# Altium PCB CW308T_EFR32MG21.PcbDoc
Units mil, origin at the board's own origin, x right, y up, seen from the top; angles counter-clockwise.
Board outline 2055 x 2540 mil, 2 copper layers (Top Layer, Bottom Layer); 18 components, 26 nets, 131 pads, 91 vias.
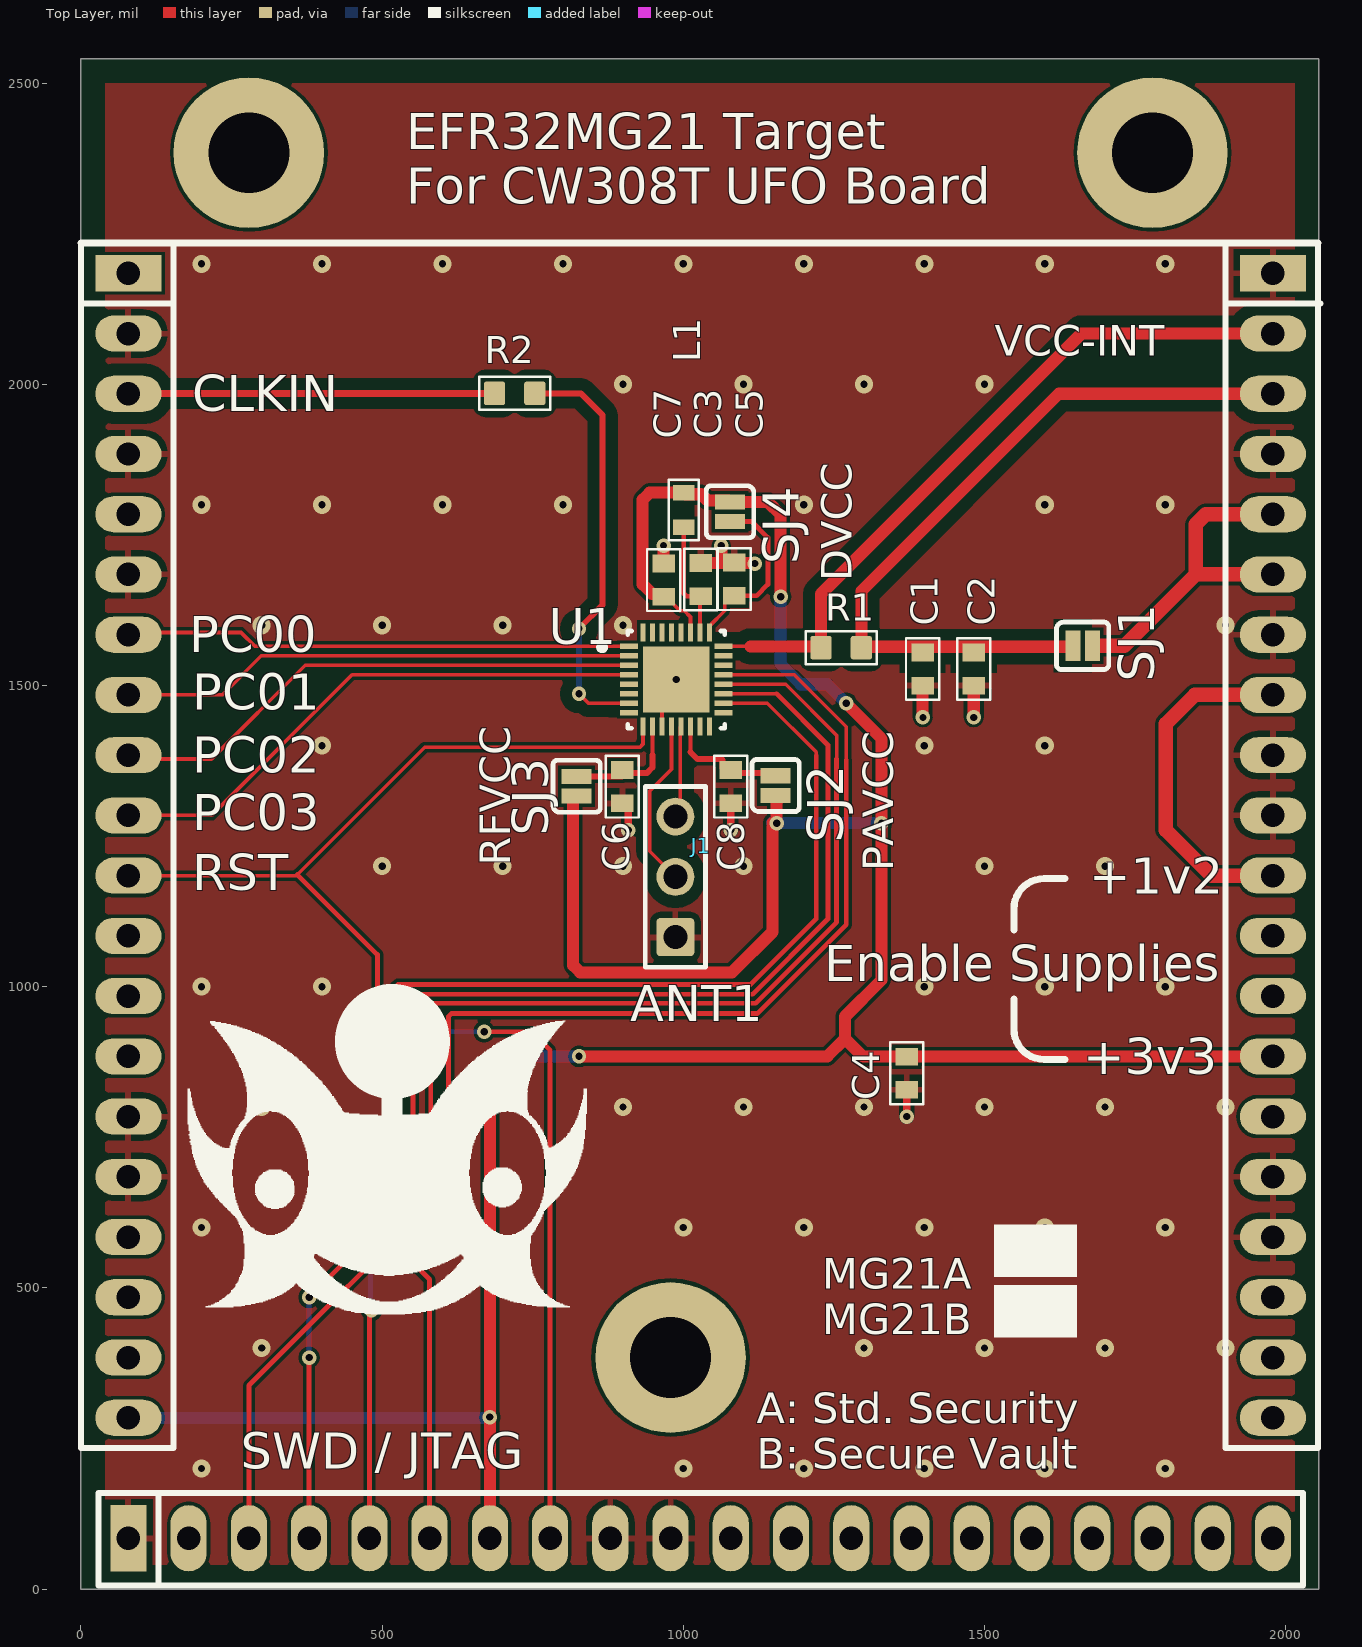
[diagram p0: Top Layer view]
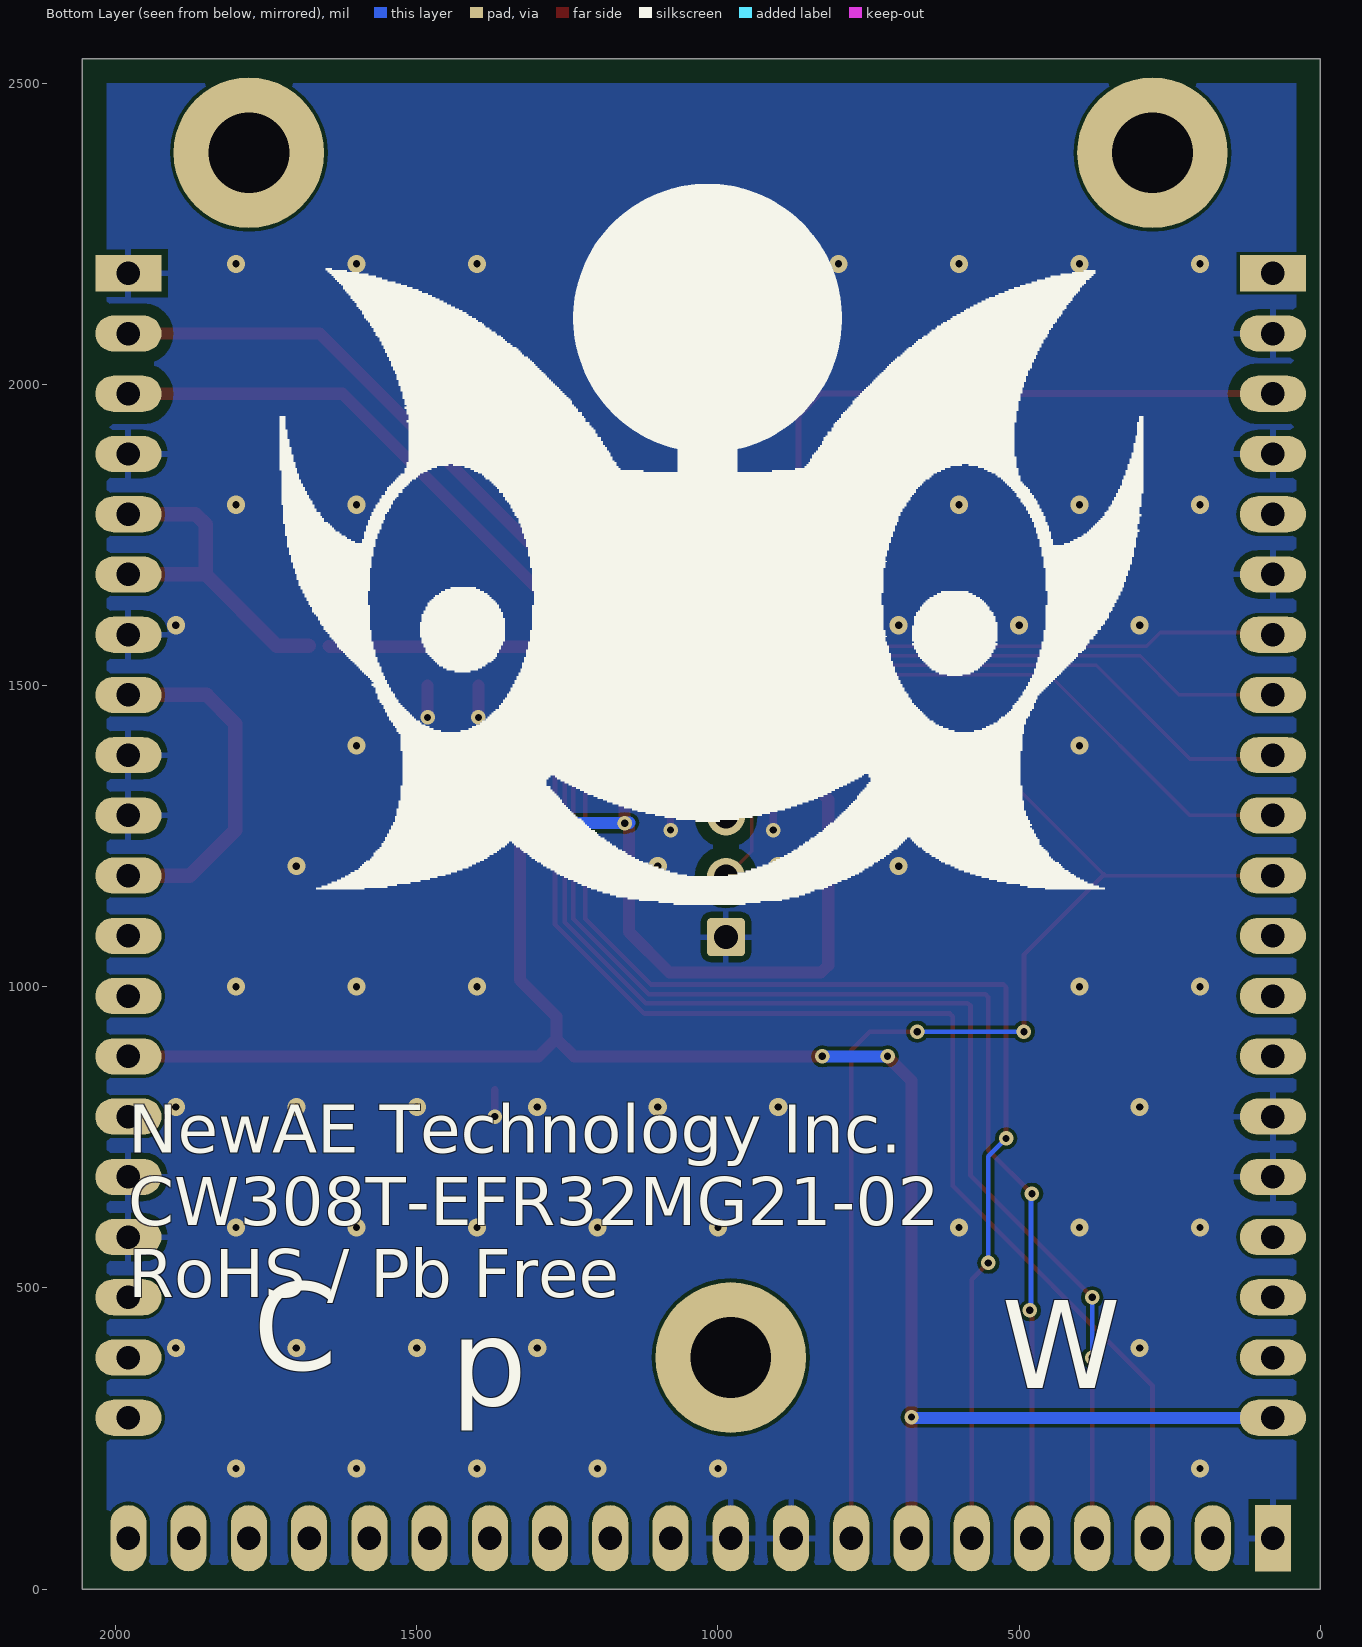
[diagram p1: Bottom Layer view, seen from below]

## Layer stack, top to bottom
Top Solder: solder mask 0.4, Solder Resist, Dk 3.5
Top Layer: signal copper 1.4
Dielectric 1: dielectric 12.6, FR-4, Dk 4.8
Bottom Layer: signal copper 1.4
Bottom Solder: solder mask 0.4, Solder Resist, Dk 3.5

## Board outline
0,0 2055,0 2055,2540 0,2540

## Design rules (kind name [scope] priority, off if disabled: settings)
BoardOutlineClearance Silk_to_Outline [(OnLayer('Top Overlay'))] p1: gap=0 ignorepadtopadclearanceinfootprint=FALSE
BoardOutlineClearance [All] p2: gap=40 ignorepadtopadclearanceinfootprint=FALSE
Clearance Clearance_1 [InNetClass('MORESPACE')] p1: gap=6 ignorepadtopadclearanceinfootprint=FALSE except(0: Arc-Hole Track-Hole SMDPad-Hole THPad-Hole Via-Hole Fill-Hole Poly-Hole Region-Hole Text-Hole; 20: Arc-Fill Arc-Poly Arc-Region Track-Fill Track-Poly Track-Region SMDPad-Fill SMDPad-Poly SMDPad-Region THPad-Fill THPad-Poly THPad-Region Via-Fill Via-Poly Via-Region Fill-Fill Fill-Poly Fill-Region Poly-Poly Poly-Region Region-Region)
Clearance [All] p2: gap=6 ignorepadtopadclearanceinfootprint=FALSE except(0: Arc-Hole Track-Hole SMDPad-Hole THPad-Hole Via-Hole Fill-Hole Poly-Hole Region-Hole Text-Hole)
HoleSize [All] p1: absolutevalues=TRUE maxlimit=200 minlimit=1 maxpercent=80.000 minpercent=20.000
MinimumSolderMaskSliver [All] p1: minsoldermaskwidth=5
PlaneConnect PlaneConnect_viaDirect [IsVia] p1: planeconnectstyle=Direct reliefexpansion=20 reliefentries=4 reliefconductorwidth=10 reliefairgap=10
PlaneConnect [All] p2: planeconnectstyle=Relief reliefexpansion=20 reliefentries=4 reliefconductorwidth=10 reliefairgap=10
PolygonConnect PolygonConnect_viaDirect [All vs isVia] p1: connectstyle=Direct reliefconductorwidth=10 reliefentries=4 polygonreliefangle="90 Angle" airgapwidth=10
PolygonConnect [All] p2: connectstyle=Relief reliefconductorwidth=10 reliefentries=4 polygonreliefangle="90 Angle" airgapwidth=10
RoutingVias [All] p1: holewidth=28 width=50 viastyle="Through Hole" minholewidth=28 minwidth=50 maxholewidth=28 maxwidth=50 useviatemplates=TRUE viatemplateguid#1={1A3752DF-5185-4C8F-B12F-78C2E36E3B79} viatemplateguid#2={10C6E2E2-26C8-43AE-A37D-40FB085232FA} viatemplateguid#3={3CB7D92B-ADEE-4C2B-B6B5-F2CE337C13DB} viatemplatename#1=v61h30m0mx0 viatemplatename#2=v86h41m0mx0 viatemplatename#3=v127h71m0mx0
SilkToSilkClearance [All] p1: silktosilkclearance=5
SilkToSolderMaskClearance [IsPad] p1: minsilkscreentomaskgap=5 clearancetoexposedcopper=TRUE
SolderMaskExpansion [All] p1: expansion=4 istentingtop=FALSE
Width [All] p1: maxlimit=100 minlimit=6 preferedwidth=8 minimp=50.000000 maximp=50.000000 favimp=50.000000
25 further rules are at their usual default settings.

## Classes and differential pairs
net class MORESPACE: CLKIN NetANT1_2 NetANT1_3 NetJ1_A3 SHUNTH SHUNTL

## Components (designator, comment, footprint, x,y, rotation, side; value= is the part's Value field where it differs from the comment)
ANT1 "Straight Header Pins" 1x3_Straight_pins 986.78,1182.3 r180 top
C1 "100n" CAPC0603_M 1397.22,1527.2 r270 top
C2 "2u2" CAPC0603_M 1482.05,1527.2 r270 top
C3 "100n" CAPC0603_M 1028.78,1675.77 r90 top
C4 "100n" CAPC0603_M 1370.75,856.22 r270 top
C5 "100n" CAPC0603_M 1084.47,1676.48 r90 top
C6 "100n" CAPC0603_M 898.5,1331.9 r270 top
C7 "100n" CAPC0603_M 967.09,1674.81 r90 top
C8 "100n" CAPC0603_M 1078.71,1331.91 r270 top
J1 "CW308_TARGETCON" CW308_TBOARD_CONN 78.74,2184.25 r0 top locked
L1 "1k @ 1Mhz" IND_0603 1000.67,1791.28 r270 top
R1 "22R" RESC1608X55N 1262.05,1562.64 r0 top
R2 "22R" RESC1608X55N 720,1985 r180 top
SJ1 "NC" SJ_2S_NC 1662.8,1565.86 r0 top
SJ2 "NC" SJ_2S_NC 1153.18,1333.87 r90 top
SJ3 "NC" SJ_2S_NC 822.84,1332.67 r90 top
SJ4 "NC" SJ_2S_NC 1077.52,1788.37 r270 top
U1 "EFR32MG21A020F1024IM32-BR" FP-EFR32MG21A020F1024IM32-MFG 988.18,1509.84 r0 top

## Footprints (in the part's own frame and the unit in brackets; to place one, negate y for a bottom-side part, rotate by r counter-clockwise, add the part's x,y. Pads: shape width x height; smd on the part's side, far side on the other; paste and mask are expansions set on the pad)
1x3_Straight_pins [mm]
  rrect20% 1.6x1.6 hole 1.02: 1(0,2.54)
  round 1.6 hole 1.02: 2(0,0) 3(0,-2.54)
  silkscreen extent -1.27,-3.81 1.27,3.81, body extent -1.27,-3.81 1.27,3.81, height 8.57
CAPC0603_M [mm]
  rect 0.75x0.95 smd: 1(-0.7,0) 2(0.7,0)
  silkscreen extent -1.3,-0.7 1.3,0.7, body extent -0.85,-0.45 0.85,0.45, height 0.9
CW308_TBOARD_CONN [mil]
  rect 110x60 hole 39: A1(0,0) C1(1900,0)
  oval 110x60 hole 39: A2(0,-100) A3(0,-200) A4(0,-300) A5(0,-400) A6(0,-500) A7(0,-600) A8(0,-700) A9(0,-800) A10(0,-900) A11(0,-1000) A12(0,-1100) A13(0,-1200) A14(0,-1300) A15(0,-1400) A16(0,-1500) A17(0,-1600) A18(0,-1700) A19(0,-1800) A20(0,-1900) C2(1900,-100) C3(1900,-200) C4(1900,-300) C5(1900,-400) C6(1900,-500) C7(1900,-600) C8(1900,-700) C9(1900,-800) C10(1900,-900) C11(1900,-1000) C12(1900,-1100) C13(1900,-1200) C14(1900,-1300) C15(1900,-1400) C16(1900,-1500) C17(1900,-1600) C18(1900,-1700) C19(1900,-1800) C20(1900,-1900)
  rect 60x110 hole 39: B1(0,-2100)
  oval 60x110 hole 39: B2(100,-2100) B3(200,-2100) B4(300,-2100) B5(400,-2100) B6(500,-2100) B7(600,-2100) B8(700,-2100) B9(800,-2100) B10(900,-2100) B11(1000,-2100) B12(1100,-2100) B13(1200,-2100) B14(1300,-2100) B15(1400,-2100) B16(1500,-2100) B17(1600,-2100) B18(1700,-2100) B19(1800,-2100) B20(1900,-2100)
  round 250 hole 134: MH1(200,200) MH2(900,-1800) MH2(1700,200)
  silkscreen extent -79,-2179 1979,50, body extent -50,-2149 1950,50, height 48
FP-EFR32MG21A020F1024IM32-MFG [mm]
  rect 0.76x0.22 smd paste+0 mask+0: 1(-1.985,1.4) 2(-1.985,1) 3(-1.985,0.6) 4(-1.985,0.2) 5(-1.985,-0.2) 6(-1.985,-0.6) 7(-1.985,-1) 8(-1.985,-1.4) 17(1.985,-1.4) 18(1.985,-1) 19(1.985,-0.6) 20(1.985,-0.2) 21(1.985,0.2) 22(1.985,0.6) 23(1.985,1) 24(1.985,1.4)
  rect 0.22x0.76 smd paste+0 mask+0: 9(-1.4,-1.985) 10(-1,-1.985) 11(-0.6,-1.985) 12(-0.2,-1.985) 13(0.2,-1.985) 14(0.6,-1.985) 15(1,-1.985) 16(1.4,-1.985) 25(1.4,1.985) 26(1,1.985) 27(0.6,1.985) 28(0.2,1.985) 29(-0.2,1.985) 30(-0.6,1.985) 31(-1,1.985) 32(-1.4,1.985)
  rect 2.8x2.8 smd paste-1000 mask+0: 33(0,0)
  silkscreen extent -3.25,-2.05 2.05,2.05, body extent -2.46,-2.46 2.46,2.46, height 0.25
IND_0603 [mm] "Chip Inductor, 2-Leads, Body 1.60x0.80mm, IPC Medium Density"
  rect 0.64x0.92 smd: 1(-0.73,0) 2(0.73,0)
  Top Layer pour cut-out: -0.686,0.457 0.838,0.457 0.838,-0.457 -0.686,-0.457
  silkscreen extent -1.27,-0.64 1.27,0.64, body extent -0.82,-0.43 0.82,0.43, height 0.9
RESC1608X55N [mm] "Chip Resistor, Body 1.6x0.8mm, EIA 0603, IPC Medium Density"
  round 0.254 on Mech15: 0(0,0)
  rrect25% 0.9x1 smd: 1(-0.85,0) 2(0.85,0)
  Top Layer pour cut-out: -0.6,0.5 0.6,0.5 0.6,-0.5 -0.6,-0.5
  silkscreen extent -1.5,-0.7 1.5,0.7, body extent -0.87,-0.47 0.88,0.48, height 0.54
SJ_2S_NC [mil] "Solder Jumper, closed with solder paste"
  rect 25x50 smd: 1(-16.22,0) 2(16.22,0)
  silkscreen extent -43,-39 43,39

## Part data
ANT1: library part HDR_3PIN, "1x3 Straight pin header", Manufacture 1="Wurth Electronics Inc.", Manufacture Part Number 1=61300311121, Supplier Part Number 1=732-5316-ND, Component Group=Connector, Component Type=Standard, Mounting Technology=Through-hole, Part Number=HDR_3PIN, Pin Count=3, PP Material Stack=0, PP Rotation=0, RoHS=Yes, Supplier 1=Digi-Key
C1 C3 C4 C5 C6 C7 C8: library part CCHIP-100n-0603, "100n, 0603", Case-EIA=0603, Case-Metric=1608, Manufacture 1=Kemet, Manufacture Part Number 1=C0603C104K5RACTU, Rated Voltage=50VDC, Supplier Part Number 1=399-5089-2-ND, Component Group=Capacitor, Component Type=Standard, Mounting Technology=SMT, Part Number=CCHIP-100n-0603, Pin Count=2, Supplier 1=Digi-Key
C2: library part CCHIP-2u2-0603, "2u2, 0603", Case-EIA=0603, Case-Metric=1608, Manufacture 1=Samsung, Manufacture Part Number 1=CL10B225KP8NNNC, Rated Voltage=10VDC, Supplier Part Number 1=1276-1134-2-ND, Component Group=Capacitor, Component Type=Standard, Mounting Technology=SMT, Part Number=CCHIP-2u2-0603, Pin Count=2, Supplier 1=Digi-Key
J1: library part CW308_TBOARD, "CW308 \"Standard\" Target Board Connector", Component Group=Mechanical, Component Type=Standard, Mounting Technology=Through-hole, Part Number=CW308_TBOARD, Pin Count=60, Pitch=2.54mm
L1: library part FBCHIP-1k-0603, "Ferrite Beads HI CUR CHIP BD 0603 1000OHMS 25%", Manufacture 1="Taiyo Yuden", Manufacture Part Number 1="FBMH1608HM102-T / FBMH1608HM102-T / FBMH1608HM102-T / FBMH1608HM102-T", Supplier Part Number 1=963-FBMH1608HM102-T, Component Group=Inductor, Component Type=Standard, Mounting Technology=SMT, Part Number=FBCHIP-1k-0603, Pin Count=2, PP Material Stack=0, PP Rotation=0, RoHS=Yes, Supplier 1=Mouser
R1 R2: library part RCHIP-22R-0603, "22R res, 0603, 1%, 1/10W", Case-EIA=0603, Case-Metric=1608, Manufacture 1=Yageo, Manufacture Part Number 1=RC0603FR-0722RL, Rated Power=0.1W, Rated Voltage=75VDC, Supplier Part Number 1=311-22.0HRCT-ND, Temperature Range="-55C to 155C", Tolerance=1%, Component Group=Resistor, Component Type=Standard, Mounting Technology=SMT, Part Number=RCHIP-22R-0603, Pin Count=2, Supplier 1=Digi-Key
SJ1 SJ2 SJ3 SJ4: library part SJ_2S, "Solder Jumper, NC", Component Group="PCB Feature", Component Type="Standard (No BOM)", Mounting Technology=COPPER, Part Number=SJ_2S, Pin Count=2
U1: library part CMP-08085-000003-1, "IC MCU 2.4G 20DB MULTIPROTOCOL", Ambient Temperature Range High=+125°C, Ambient Temperature Range Low=-40°C, Frequency=80MHz, Manufacturer="Silicon Labs", Max Junction Temp=+135°C, Max Supply Voltage=3.8V, Min Supply Voltage=1.71V, Package=0, Temperature="to +135°C", Automotive=No, Category=IC, ComponentLink2Description=Datasheet, ComponentLink2URL=https://www.silabs.com/documents/public/data-sheets/efr32mg21-datasheet.pdf, Core Architecture="ARM Cortex-M33", Data Bus Width=32bits, Device Class L1="Integrated Circuits (ICs)", Device Class L2="Embedded Processors and Controllers", Device Class L3=Microcontrollers, Digikey Description="IC MCU 2.4G 20DB MULTIPROTOCOL", Height=0.9mm, Interface=I2C,SPI,UART,USART,IrDA,I2S,SMBus,RS-485,Other, Ipc Land Pattern Name=QFN40P400X400X85-32, Lead Free=Yes, Manufacturer Part Number=EFR32MG21A020F1024IM32-BR, Memory Size=1024KBytes, Memory Type=FLASH, Number Of A/D Converters=1, Number Of Adc Channels=1, Number Of Cores=1, Number Of I2C Channels=2, Number Of I/Os=20, Number Of Pwm Channels=6, Number Of Spi Channels=3, Number Of Timers/Counters=5, Number Of Uart Channels=3, Octopart=https://octopart.com/efr32mg21a020f1024im32-br-silicon+labs-98975230, Ram Size=96KBytes, RoHS=TRUE, Standoff Height=0mm, Temperature Range High=+135°C

## Via types
v1: diameter 30, hole 12, Top Layer to Bottom Layer, tented both sides, 65 vias
v2: diameter 24, hole 12, Top Layer to Bottom Layer, tented both sides, 25 vias
v3: diameter 24, hole 12, Top Layer to Bottom Layer, 1 vias

## Nets (pads, with @x,y where several pads share a name; then routed paths per layer and width w, separated by ;. In a path a pad name is that pad's centre, name@x,y a point inside that pad or via, vN(x,y) a via of type N, cw(c..) or ccw(c..) an arc to the next point about the centre after c; other vN are vias at no path point)
+3v3: C4.1 C7.1 J1.A20 J1.B7 J1.C14 L1.1 SJ2.1 SJ3.1 SJ4.1 U1.27 | length 5275.9
  Top Layer w6: C7.1 971.03,1647.25 994.26,1624.02 1001.48,1624.02 1011.8,1613.7 U1.27
  Top Layer w20: J1.B7 v2(678.74,285.43) 678.74,844.02 718.5,883.78 v2(718.5,884.25) ; SJ3.1 816.93,1310.55 816.93,1269.94 816.93,1035.34 828.64,1023.62 1080.69,1023.62 1147.86,1090.79 v2@1147.86,1271.33 ; v2(826.77,884.25) 1238.9,884.25 1268.39,913.74 ; C7.1 962.32,1652.01 948.16,1652.01 932.39,1667.79 932.39,1808.3 944.1,1820.02 L1.1 1003.27,1817.42 1029.63,1817.42 1039.97,1807.08 1075.02,1807.08 SJ4.1 1140.44,1804.58 1161.53,1783.5 v2(1161.53,1647.25) ; SJ2.1 1159.44,1317.65 1161.94,1315.15 1154.91,1308.13 v2(1154.91,1271.33) ; v2(1270.35,1470.47) 1328.74,1412.08 v2(1328.74,1271.33) 1328.74,1010.87 1268.39,950.51 1268.39,913.74 ; J1.C14 1978.5,884.02 1370.98,884.02 C4.1 1298.35,883.78 1268.39,913.74
  Bottom Layer w20: J1.A20 677.56,284.25 v2(678.74,285.43) ; v2(718.5,884.25) v2(826.77,884.25) ; v2@1147.1,1272.1 1147.86,1271.33 v2(1328.74,1271.33) ; v2@1161.42,1647.94 1161.42,1535.43 1194.88,1501.97 1238.86,1501.97 v2(1270.35,1470.47)
CLKIN: R2.1 U1.7 | length 696.4
  Top Layer w6: v2(826.77,1486.22) 842.52,1470.47 U1.7
  Top Layer w10: R2.1 829.96,1985 866.14,1948.82 866.14,1633.86 v2(826.77,1594.49)
  Bottom Layer w10: v2(826.77,1486.22) v2(826.77,1594.49)
FILT: J1.C5 J1.C6 SJ1.2 | length 567
  Top Layer w24: SJ1.2 1732.28,1565.86 1850.67,1684.25 ; J1.C6 1850.67,1684.25 ; J1.C5 1867.48,1784.25 1850.67,1767.44 1850.67,1684.25
GND: ANT1.1 C1.2 C2.2 C3.2 C4.2 C5.2 C6.2 C7.2 C8.2 J1.A2 J1.A4 J1.A6 J1.A15 J1.A16 J1.B1 J1.B9 J1.B10 J1.C1 J1.C4 J1.C7 J1.C9 J1.C10 J1.C16 J1.C17 U1.11 U1.33 | length 476
  Top Layer w6: U1.11 964.56,1486.22 v3(988.18,1509.84)
  Top Layer w12: v2(908.34,1259.84) C6.2@908.34,1304.35 ; v2(1078.71,1259.84) C8.2 ; v2(1370.75,784.25) C4.2
  Top Layer w20: C7.2 v2(967.09,1732.28) ; C3.2 1062.99,1703.33 ; v2(1062.99,1732.28) 1062.99,1703.33 ; v2(1118.44,1702.37) 1117.68,1703.13 1084.67,1703.13 1084.47,1703.33 1062.99,1703.33 ; C1.2 1397.22,1447.27 v2(1397.64,1446.85) ; v2(1482.05,1446.85) C2.2
  other v1: 200,200 1000,200 1200,200 1400,200 1600,200 1800,200 300,400 1300,400 1500,400 1700,400 1900,400 200,600 400,600 600,600 1000,600 1200,600 1400,600 1600,600 1800,600 300,800 900,800 1100,800 1300,800 1500,800 1700,800 1900,800 200,1000 400,1000 1400,1000 1600,1000 1800,1000 500,1200 700,1200 900,1200 1100,1200 1500,1200 1700,1200 400,1400 1400,1400 1600,1400 300,1600 500,1600 700,1600 900,1600 1900,1600 200,1800 400,1800 600,1800 800,1800 1200,1800 1600,1800 1800,1800 900,2000 1100,2000 1300,2000 1500,2000 200,2200 400,2200 600,2200 800,2200 1000,2200 1200,2200 1400,2200 1600,2200 1800,2200
GPIO1: J1.A7 U1.1 | length 842.4
  Top Layer w6: J1.A7 82.48,1587.99 265.75,1587.99 288.78,1564.96 U1.1
GPIO2: J1.A8 U1.2 | length 858.2
  Top Layer w6: J1.A8 234.25,1484.25 299.21,1549.21 U1.2
GPIO3: J1.A9 U1.3 | length 898.3
  Top Layer w6: J1.A9 85.04,1377.95 216.54,1377.95 372.04,1533.46 U1.3
GPIO4: J1.A10 U1.4 | length 928
  Top Layer w6: J1.A10 216.54,1284.25 450,1517.71 U1.4
NetANT1_2: ANT1.2 U1.12 | length 287.6
  Top Layer w6: U1.12 980.31,1361.03 944.1,1324.83 944.1,1224.98 977.38,1191.7 986.78,1191.7 ANT1.2
NetANT1_3: ANT1.3 U1.13 | length 153.2
  Top Layer w6: ANT1.3 994.73,1290.25 994.73,1430.36 U1.13
NetC3_1: C3.1 L1.2 U1.26 | length 200.9
  Top Layer w6: U1.26 1027.55,1646.98 C3.1
  Top Layer w8: L1.2 1000.67,1722.82 1000.08,1722.23 1000.08,1653.49 1005.35,1648.21 C3.1
NetC5_1: C5.1 SJ4.2 U1.25 | length 295.7
  Top Layer w6: U1.25 1043.3,1598.62 1068.77,1624.09 1068.77,1637.15 1080.54,1648.92 C5.1
  Top Layer w8: SJ4.2 1113.74,1772.15 1140.44,1745.44 1140.44,1667.79 1121.58,1648.92 C5.1
NetC6_1: C6.1 SJ3.2 U1.10 | length 199.5
  Top Layer w6: 948.81,1384.9 U1.10
  Top Layer w10: SJ3.2 C6.1@898.5,1348.89 ; C6.1 903.38,1354.58 939.22,1354.58 948.81,1364.17 948.81,1384.9
NetC8_1: C8.1 SJ2.2 U1.14 | length 200.3
  Top Layer w6: 1011.8,1389.38 U1.14
  Top Layer w10: 1011.8,1389.38 1023.23,1377.95 1063.01,1377.95 1065.01,1375.95 1065.01,1363.32 1073.56,1354.77 1141.43,1354.77 SJ2.2@1146.12,1350.08
NetJ1_A3: J1.A3 R2.2 | length 608.1
  Top Layer w12: J1.A3 79.11,1984.63 686.16,1984.63 R2.2
NetJ1_C8: J1.C8 J1.C11 | length 583
  Top Layer w24: J1.C11 1876.77,1184.25 1801.18,1259.84 1801.18,1436.73 1848.71,1484.25 J1.C8
PC6: J1.C19
PC7: J1.C18
PD8: J1.C20
RST: J1.A11 J1.B8 U1.9 | length 2399.2
  Top Layer w6: J1.A11 357.48,1184.25 570.87,1397.64 928.02,1397.64 933.06,1402.68 U1.9
  Top Layer w8: 359.25,1186.02 492.13,1053.15 v2(492.13,925.2) ; v2(669.29,925.2) 748.03,925.2 778.74,894.49 J1.B8
  Bottom Layer w8: v2(492.13,925.2) v2(669.29,925.2)
SHUNTH: C1.1 C2.1 J1.C3 R1.2 SJ1.1 | length 1265.3
  Top Layer w20: SJ1.1 1644.97,1564.25 1297.12,1564.25 R1.2 1295.51,1656.5 1623.27,1984.25 J1.C3
SHUNTL: J1.C2 R1.1 U1.24 | length 1181.7
  Top Layer w6: U1.24 1111.5,1564.96
  Top Layer w20: 1111.5,1564.96 1220.47,1564.96 1226.26,1564.96 R1.1 1228.58,1651.81 1661.02,2084.25 J1.C2
SWCLK: J1.B6 U1.18 | length 2148.8
  Top Layer w6: U1.18 1139.38,1470.47 1220.47,1389.38 1220.47,1384.25
  Top Layer w8: v2(521.65,748.03) 521.65,998.94 526.34,1003.62 1111.55,1003.62 1220.47,1112.55 1220.47,1384.25 ; v2(551.18,541.34) 578.74,513.78 J1.B6
  Bottom Layer w8: v2(521.65,748.03) 551.18,718.5 v2(551.18,541.34)
SWDIO: J1.B5 U1.19 | length 2171.8
  Top Layer w6: U1.19 1154.88,1486.22
  Top Layer w8: J1.B5 478.74,453.23 479.22,453.71 479.22,459.54 v2(482.28,462.6) ; v2(478.74,656.3) 551.18,728.74 551.18,982.75 555.87,987.43 1115.16,987.43 1240.16,1112.43 1240.16,1400.94 1154.88,1486.22
  Bottom Layer w8: v2(478.74,656.3) 480.51,654.53 480.51,464.37 v2(482.28,462.6)
TDI: J1.B3 U1.21 | length 2294.9
  Top Layer w6: U1.21 1183.94,1517.71 1270.35,1431.31 1270.35,1375.99
  Top Layer w8: J1.B3 278.74,337.8 610.24,669.29 610.24,950.51 614.92,955.19 1122.52,955.19 1270.35,1103.03 1270.35,1375.99
TDO: J1.B4 U1.20 | length 2232.1
  Top Layer w6: U1.20 1169.74,1501.97 1254.39,1417.32 1254.39,1377.95
  Top Layer w8: J1.B4 v2(378.74,384.25) ; v2(378.74,484.25) 580.71,686.22 580.71,967.85 585.39,972.54 1120.06,972.54 1254.39,1106.86 1254.39,1377.95
  Bottom Layer w8: v2(378.74,384.25) v2(378.74,484.25)
pads on no net: J1.A1 J1.A5 J1.A12 J1.A13 J1.A14 J1.A17 J1.A18 J1.A19 J1.B2 J1.B11 J1.B12 J1.B13 J1.B14 J1.B15 J1.B16 J1.B17 J1.B18 J1.B19 J1.B20 J1.C12 J1.C13 J1.C15 J1.MH1 J1.MH2 R1.0 R2.0 U1.5 U1.6 U1.8 U1.15 U1.16 U1.17 U1.22 U1.23 U1.28 U1.29 U1.30 U1.31 U1.32

## Polygon pours and split planes (outlines as drawn)
GND on Bottom Layer "GND_L02_P002" (solid, remove dead copper, pour order 2): 0,2539.37 2047.24,2539.37 2047.24,0 0,0
GND on Top Layer "GND_L01_P003" (solid, remove dead copper, pour order 3): 29.53,2529.53 39.37,2519.68 2027.56,2519.68 2027.56,0 1938.98,-88.58 -9.84,-88.58

## Silkscreen, mask and mechanical layers (free items; w line width, h text height)
Top Overlay:
  drawing of 14 lines, arcs and shapes, not listed
  text "EFR32MG21 Target / For CW308T UFO Board" at 540,2300 h60
  text "VCC-INT" at 1517.05,2047.24 h50
  text "CLKIN" at 185,1955 h60
  text "DVCC" at 1279.53,1673.23 h50 r90
  text "PC00" at 180,1555 h60
  text "PC01" at 185,1460 h60
  text "PC02" at 185,1355 h60
  text "PC03" at 185,1260 h60
  text "RFVCC" at 712.55,1200.79 h50 r90
  text "PAVCC" at 1348.43,1191.7 h50 r90
  text "RST" at 185,1160 h60
  text "+1v2" at 1673.74,1154.25 h60
  text "Enable Supplies" at 1233.74,1009.25 h60
  text "+3v3" at 1663.74,854.25 h60
  text "MG21A / MG21B" at 1230.32,423.23 h50
  text "SWD / JTAG" at 265,200 h60
  text "A: Std. Security / B: Secure Vault" at 1122.05,200 h50
Bottom Overlay:
  drawing of 5 lines, arcs and shapes, not listed
  text "NewAE Technology Inc. / CW308T-EFR32MG21-02 / RoHS / Pb Free" at 1978.74,484.25 h80
  text "C" at 1771.65,314.96 h250
  text "W" at 528.72,285.43 h250
  text "p" at 1443.51,255.91 h250
Mechanical 1:
  the board outline again, w10